# Altium PCB Sedra stage 1.PcbDoc
Units mm, origin at the board's own origin, x right, y up, seen from the top; angles counter-clockwise.
Board outline 50.04 x 99.95 mm, 2 copper layers (Top Layer, Bottom Layer); 27 components, 20 nets, 62 pads, 7 vias.
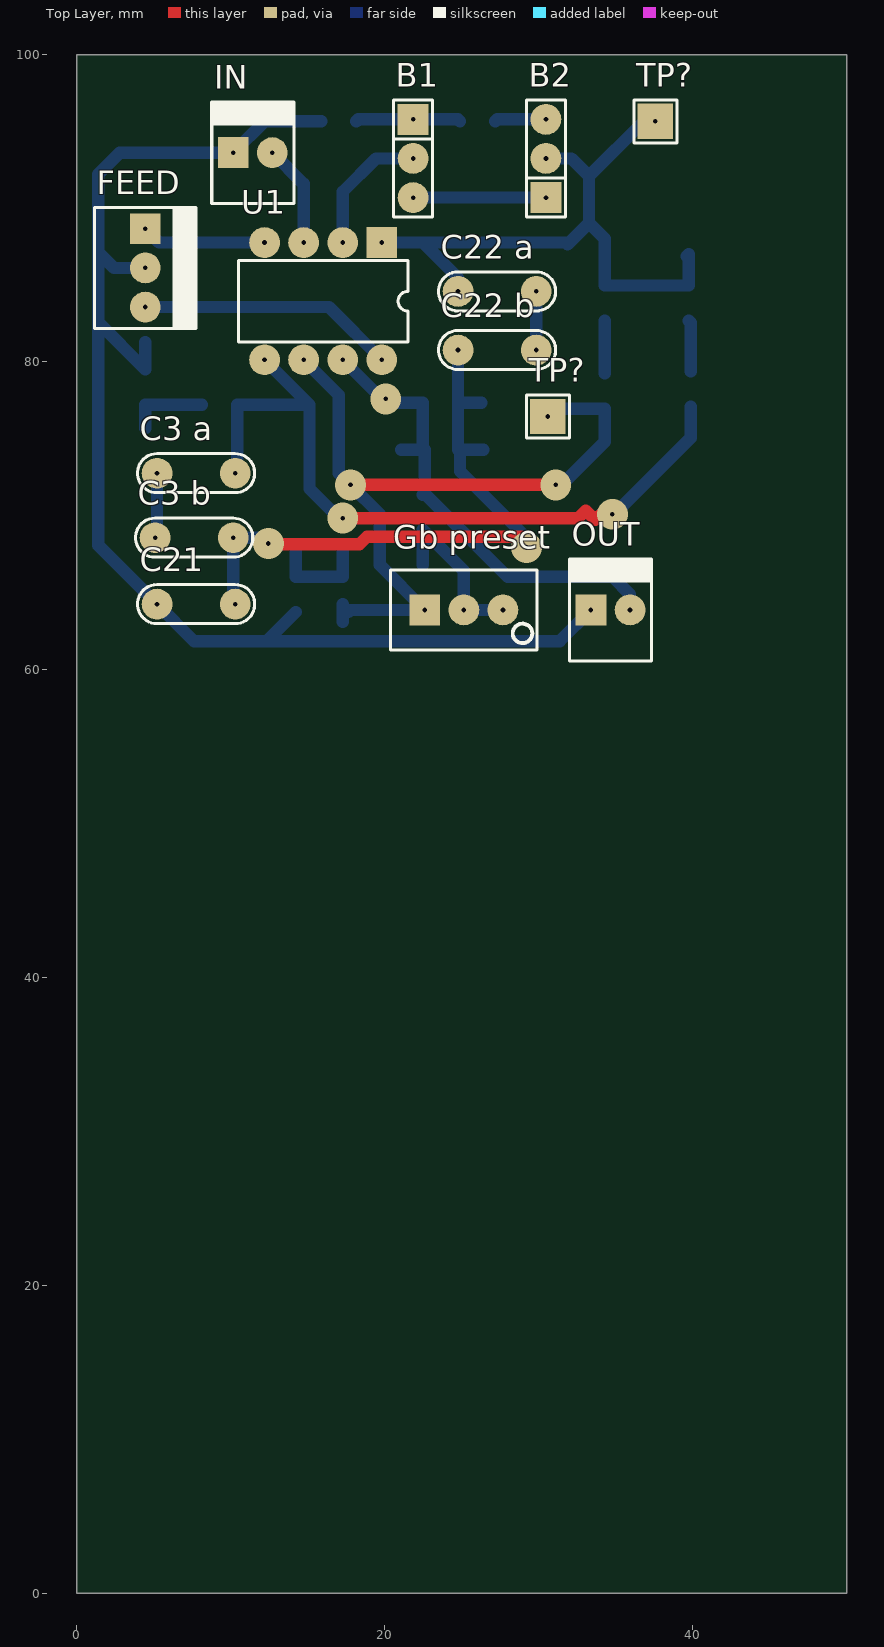
[diagram p0: Top Layer view]
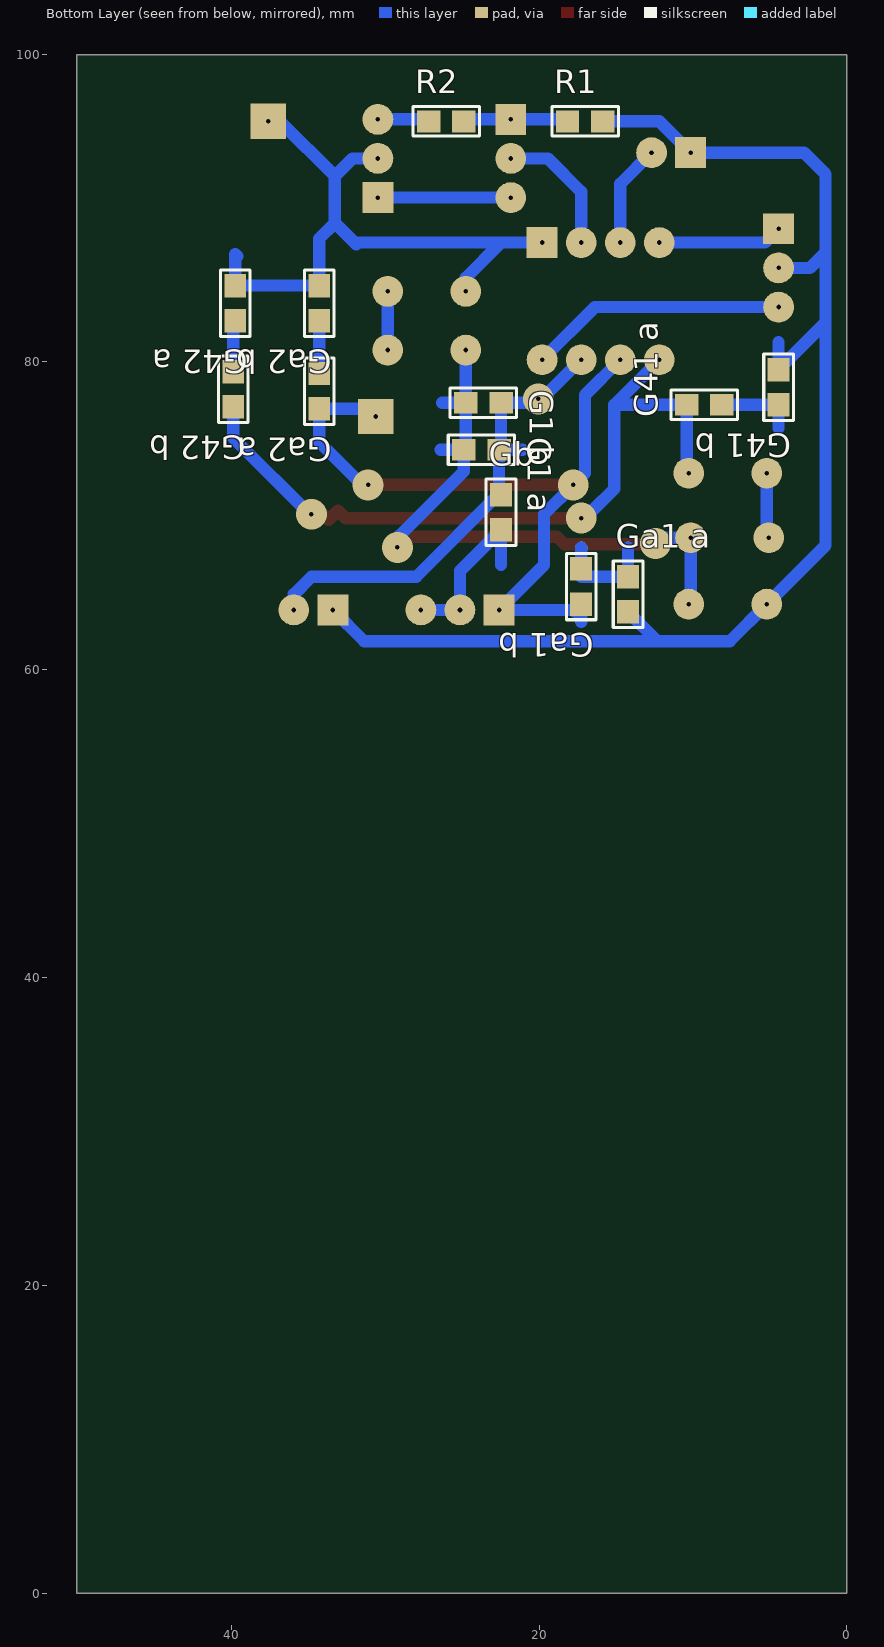
[diagram p1: Bottom Layer view, seen from below]
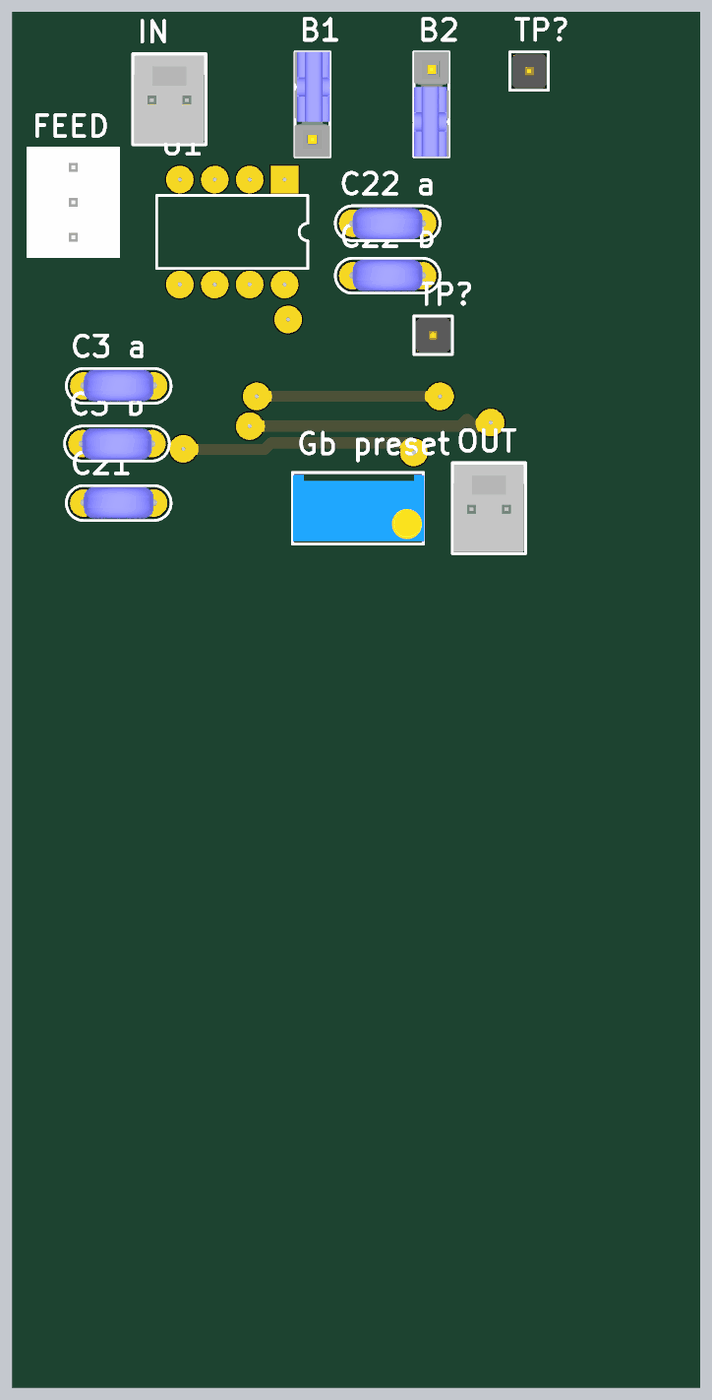
[diagram p2: 3D render of the assembled board from above, using the file's embedded part models]
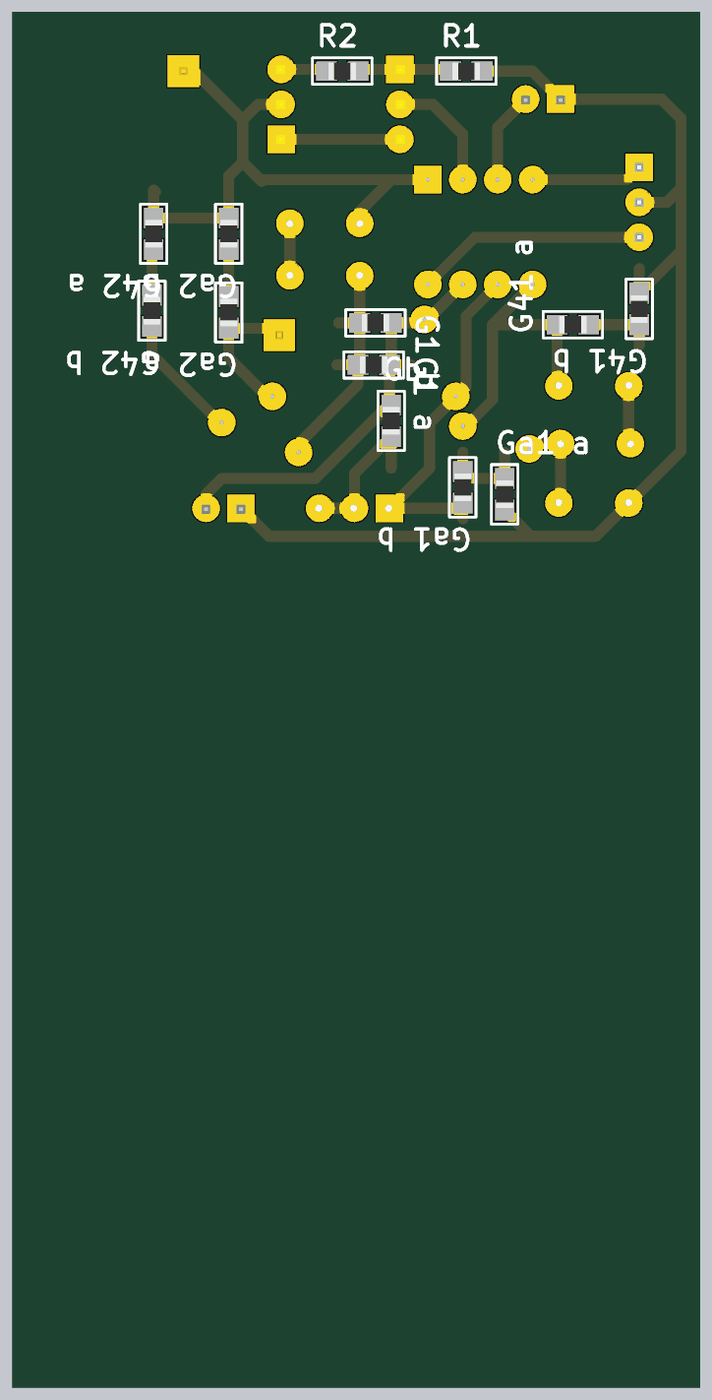
[diagram p3: 3D render of the assembled board from below, using the file's embedded part models]

## Layer stack, top to bottom
Top Solder: solder mask 0.0102, Solder Resist, Dk 3.5
Top Layer: signal copper 0.0356
Dielectric 1: dielectric 0.32, FR-4, Dk 4.8
Bottom Layer: signal copper 0.0356
Bottom Solder: solder mask 0.0102, Solder Resist, Dk 3.5

## Board outline
0,0 50.038,0 50.038,99.949 0,99.949

## Design rules (kind name [scope] priority, off if disabled: settings)
Clearance [All] p1: gap=0.3 ignorepadtopadclearanceinfootprint=FALSE
PolygonConnect [All] p1: connectstyle=Relief reliefconductorwidth=0.254 reliefentries=4 polygonreliefangle="90 Angle" airgapwidth=0.254
RoutingVias [All] p1: holewidth=0.3 width=2 viastyle="Through Hole" minholewidth=0.3 minwidth=2 maxholewidth=0.3 maxwidth=2
SolderMaskExpansion [All] p1: expansion=0.102
Width [All] p1: maxlimit=0.9 minlimit=0.6 preferedwidth=0.8
30 further rules are at their usual default settings.

## Components (designator, comment, footprint, x,y, rotation, side; value= is the part's Value field where it differs from the comment)
B1 "JUMPER" JUMPER3 21.844,93.218 r270 top
B2 "JUMPER" JUMPER3 30.48,93.218 r90 top
"C3 a" "5n6" CAP200 7.747,72.771 r180 top
"C3 b" "82n" CAP200 7.62,68.58 r0 top
C21 "560p" CAP200 7.747,64.262 r180 top
"C22 a" "4n7" CAP200 27.305,84.582 r0 top
"C22 b" "680n" CAP200 27.305,80.772 r180 top
FEED "MOLEX3" MOLEX3 4.445,88.646 r270 top
"G1 a" "470" 0805 23.749,74.295 r180 bottom
"G1 b" "18k" 0805 23.622,77.343 r180 bottom
"G41 a" "220" 0805 9.271,77.216 r0 bottom
"G41 b" "6k8" 0805 4.445,78.359 r270 bottom
"G42 a" "47" 0805 39.751,83.82 r270 bottom
"G42 b" "12k" 0805 39.878,78.232 r270 bottom
"Ga1 a" "180" 0805 14.224,64.897 r90 bottom
"Ga1 b" "15k" 0805 17.272,65.405 r270 bottom
"Ga2 a" "3k9" 0805 34.29,78.105 r270 bottom
"Ga2 b" "10k" 0805 34.29,83.82 r270 bottom
Gb "RES" 0805 22.479,70.231 r270 bottom
"Gb preset" "PRESET" "PRESET V" 25.146,63.881 r0 top
IN "MOLEX2" MOLEX2 10.16,93.599 r0 top
OUT "MOLEX2" MOLEX2 33.401,63.881 r0 top
R1 "RES" 0805 17.018,95.631 r0 bottom
R2 "RES" 0805 26.035,95.631 r0 bottom
TP? "TP" TPTH 30.607,76.454 r0 top
TP? "TP" TPTH 37.592,95.631 r90 top
U1 "TL082ACN" DIP8 16.002,83.947 r180 top

## Footprints (in the part's own frame and the unit in brackets; to place one, negate y for a bottom-side part, rotate by r counter-clockwise, add the part's x,y. Pads: shape width x height; smd on the part's side, far side on the other; paste and mask are expansions set on the pad)
0805 [mil] "Pasivo 0805"
  rect 60x56 smd: 1(-45,0) 2(45,0)
  silkscreen extent -85,-38 85,38, body extent -39,-25 39,25, height 15
CAP200 [mm]
  round 2 hole 0.3: 1(-2.54,0) 2(2.54,0)
  silkscreen extent -3.81,-1.27 3.81,1.27, body extent -2.79,-1.17 2.79,1.12, height 6.24
DIP8 [mm] "DIP; 8 Leads; Row Spacing 7.62 mm; Pitch 2.54 mm"
  rect 2x2 hole 0.3: 1(-3.81,-3.81)
  round 2 hole 0.3: 2(-1.27,-3.81) 3(1.27,-3.81) 4(3.81,-3.81) 5(3.81,3.81) 6(1.27,3.81) 7(-1.27,3.81) 8(-3.81,3.81)
  silkscreen extent -5.5,-2.65 5.5,2.65
JUMPER3 [mm]
  rect 2x2 hole 0.3: 1(-2.54,0)
  round 2 hole 0.3: 2(0,0) 3(2.54,0)
  silkscreen extent -3.81,-1.27 3.81,1.27, body extent -3.81,-1.3 3.81,1.27, height 16.15
MOLEX2 [mm]
  rect 2x2 hole 0.3: 1(0,0)
  round 2 hole 0.3: 2(2.54,0)
  silkscreen extent -1.4,-3.3 3.94,3.3, body extent -1.27,-3.17 3.81,3.17, height 10.74
MOLEX3 [mm]
  rect 2x2 hole 0.3: 1(0,0)
  round 2 hole 0.3: 2(2.54,0) 3(5.08,0)
  silkscreen extent -1.4,-3.3 6.48,3.3, body extent -1.27,-3.18 6.35,3.18, height 10.74
"PRESET V" [mm]
  rect 2x2 hole 0.3: 1(-2.54,0)
  round 2 hole 0.3: 2(0,0) 3(2.54,0)
  silkscreen extent -4.76,-2.6 4.76,2.6, body extent -4.7,-2.42 4.83,2.42, height 11.55
TPTH [mm]
  rect 2.3x2.3 hole 0.3: 1(0,0)
  silkscreen extent -1.4,-1.4 1.4,1.4, body extent -1.27,-1.27 1.27,1.27, height 6.04

## Part data
B1 B2: library part JUMPER3
"C3 a" "C3 b" C21 "C22 a" "C22 b": library part CAP
"G1 a" "G1 b" "G41 a" "G41 b" "G42 a" "G42 b" "Ga1 a" "Ga1 b" "Ga2 a" "Ga2 b": library part RES
U1: "General-Purpose J-FET Dual Operational Amplifier", Code_JEDEC=MO-001-AN, ComponentLink1Description="Manufacturer Link", ComponentLink1URL=http://www.st.com/, ComponentLink2Description=Datasheet, ComponentLink2URL=http://www.st.com/stonline/products/literature/ds/2300/tl082.pdf, DatasheetVersion=Jan-1999, LatestRevisionDate=06-Jun-2005, LatestRevisionNote="Stylized 3D Model Added.", PackageDescription="DIP; 8 Leads; Row Spacing 7.62 mm; Pitch 2.54 mm", PackageReference=DIP8, Published=24-Aug-2001, Publisher="Altium Limited"

## Via types
v1: diameter 2, hole 0.3, Top Layer to Bottom Layer, 7 vias

## Nets (pads, with @x,y where several pads share a name; then routed paths per layer and width w, separated by ;. In a path a pad name is that pad's centre, name@x,y a point inside that pad or via, vN(x,y) a via of type N, cw(c..) or ccw(c..) an arc to the next point about the centre after c; other vN are vias at no path point)
+VCC: FEED.3 U1.8 | length 16.8
  Bottom Layer w0.8: FEED.3 16.383,83.566 U1.8
-VCC: FEED.1 U1.4 | length 8.1
  Bottom Layer w0.8: FEED.1 5.334,87.757 U1.4
GND: "G41 b.1" "Ga1 a.1" C21.2 FEED.2 IN.1 OUT.1 R1.1 | length 87.7
  Bottom Layer w0.8: 4.445,81.28 4.445,79.502 1.397,82.55 ; FEED.2 2.413,86.106 1.397,87.122 ; 14.224,63.754 12.319,61.849 ; R1.1 12.192,95.631 IN.1 2.794,93.599 1.397,92.202 1.397,87.122 ; OUT.1 31.369,61.849 12.319,61.849 ; 1.397,82.55 1.397,68.072 C21.2 7.62,61.849 12.319,61.849 ; 1.397,82.55 1.397,87.122
NetB1_1: B1.1 R1.2 R2.1 | length 6.8
  Bottom Layer w0.8: R1.2 18.288,95.758 B1.1 24.765,95.758 R2.1
NetB1_2: B1.2 U1.2 | length 8.8
  Bottom Layer w0.8: U1.2 17.272,91.059 19.431,93.218 B1.2
NetB1_3: B1.3 B2.1 | length 8.6
  Bottom Layer w0.8: B1.3 B2.1
NetB2_2: "C22 a.1" "G42 a.1" "Ga2 b.1" B2.2 TP?.1@37.592,95.631 U1.1 | length 42.6
  Bottom Layer w0.8: U1.1 22.479,87.757 ; 24.765,84.582 24.765,85.471 22.479,87.757 ; B2.2 32.131,93.218 33.274,92.075 ; 31.877,87.63 32.004,87.757 ; TP?.1@37.592,95.631 36.83,95.631 33.274,92.075 ; 39.624,86.868 39.751,86.995 39.751,84.963 34.29,84.963 34.29,88.011 33.274,89.027 ; 22.479,87.757 32.004,87.757 ; 32.004,87.757 33.274,89.027 ; 33.274,89.027 33.274,92.075
NetB2_3: B2.3 R2.2 | length 3.4
  Bottom Layer w0.8: R2.2 27.305,95.758 B2.3
"NetC3 a_1": "C3 a.1" "G41 a.2" "G42 b.2" U1.5 | length 51.5
  Top Layer w0.8: v1(17.272,69.85) 32.576,69.85 33.068,70.342 33.687,69.723 34.306,70.342 34.671,69.977 v1(34.798,70.104)
  Bottom Layer w0.8: 10.287,72.771 10.414,72.898 10.414,77.216 15.113,77.216 ; U1.5 15.113,77.216 ; v1@17.145,69.723 v1@17.018,69.85 ; v1(17.272,69.85) v1@17.018,69.85 ; v1@17.526,70.326 v1@17.51,70.342 ; v1@34.671,69.85 39.878,75.057 39.878,77.089 ; 15.113,77.216 15.113,71.755 v1@16.526,70.342 ; v1@16.526,70.342 v1@17.51,70.342 ; v1@16.526,70.342 v1@17.018,69.85 ; v1@17.018,69.85 v1@17.51,70.342
"NetC3 a_2": "C3 a.2" "C3 b.1" | length 4.2
  Bottom Layer w0.8: 5.08,68.58 5.207,68.707 5.207,72.771
"NetC3 b_2": "C3 b.2" "C22 b.2" "G1 a.1" "G1 b.1" C21.1 | length 41.4
  Top Layer w0.8: v1(12.446,68.199) 12.495,68.15 18.357,68.15 18.849,68.642 28.894,68.642 29.21,68.326 v1(29.21,67.945)
  Bottom Layer w0.8: C21.1 10.16,64.389 10.16,68.58 12.446,68.58 v1(12.446,68.199) ; 24.765,74.295 24.765,77.343 ; 24.765,80.772 24.765,77.343 ; 26.289,77.343 24.765,77.343 ; 26.416,74.295 24.892,74.295 24.892,72.898 v1@29.083,68.707
"NetC22 a_2": "C22 a.2" "C22 b.1" | length 3.8
  Bottom Layer w0.8: 29.845,80.772 29.845,84.582
"NetG1 a_2": "G1 a.2" "G1 b.2" Gb.1 OUT.2 U1.7 | length 31.1
  Bottom Layer w0.8: U1.7 20.066,77.343 22.479,77.343 22.479,74.295 ; 21.082,74.295 22.479,74.295 ; OUT.2 35.941,64.897 34.798,66.04 27.99,66.04 22.656,71.374 Gb.1 22.606,71.501 22.606,74.295 22.479,74.295
  other v1: 20.066,77.597
"NetG41 a_1": "G41 a.1" "G41 b.2" | length 5.2
  Bottom Layer w0.8: 4.445,75.692 4.445,77.216 8.128,77.216
"NetG42 a_2": "G42 a.2" "G42 b.1" | length 3.4
  Bottom Layer w0.8: 39.751,82.677 39.878,82.55 39.878,79.375
"NetGa1 a_2": "Ga1 a.2" "Ga1 b.1" | length 6.9
  Bottom Layer w0.8: 14.224,67.945 14.224,66.04 17.272,66.04 17.272,66.548 17.272,67.945
"NetGa1 b_2": "Ga1 b.2" "Ga2 a.2" "Gb preset.1" TP?.1@30.607,76.454 U1.6 | length 49.8
  Top Layer w0.8: v1(17.78,72.009) v1(31.115,72.009)
  Bottom Layer w0.8: U1.6 17.018,77.851 17.018,72.771 v1(17.78,72.009) 19.685,70.104 19.685,66.802 22.606,63.881 17.78,63.881 17.653,63.754 17.272,63.754 ; 17.272,63.119 17.272,63.754 ; 17.272,64.262 17.272,63.754 ; TP?.1@30.607,76.454 31.115,76.962 34.29,76.962 34.29,74.803 31.496,72.009 v1(31.115,72.009)
"NetGa2 a_1": "Ga2 a.1" "Ga2 b.2" | length 3.4
  Bottom Layer w0.8: 34.29,79.248 34.29,82.677
NetGb_2: "Gb preset.2" "Gb preset.3" Gb.2 | length 11.1
  Bottom Layer w0.8: 22.479,66.802 Gb.2 25.146,66.421 25.146,63.881 27.686,63.881
NetIN_2: IN.2 U1.3 | length 6.7
  Bottom Layer w0.8: IN.2 14.732,91.567 U1.3